# Altium PCB 400631.PcbDoc (part 8 of 8)
Units mm, origin at the board's own origin, x right, y up, seen from the top; angles counter-clockwise.
Board outline 136.53 x 63.5 mm, 4 copper layers (Top Layer, Mid-Layer 1, Mid-Layer 2, Bottom Layer), stack 1.52 mm thick; 366 components, 256 nets, 1485 pads, 1968 vias.
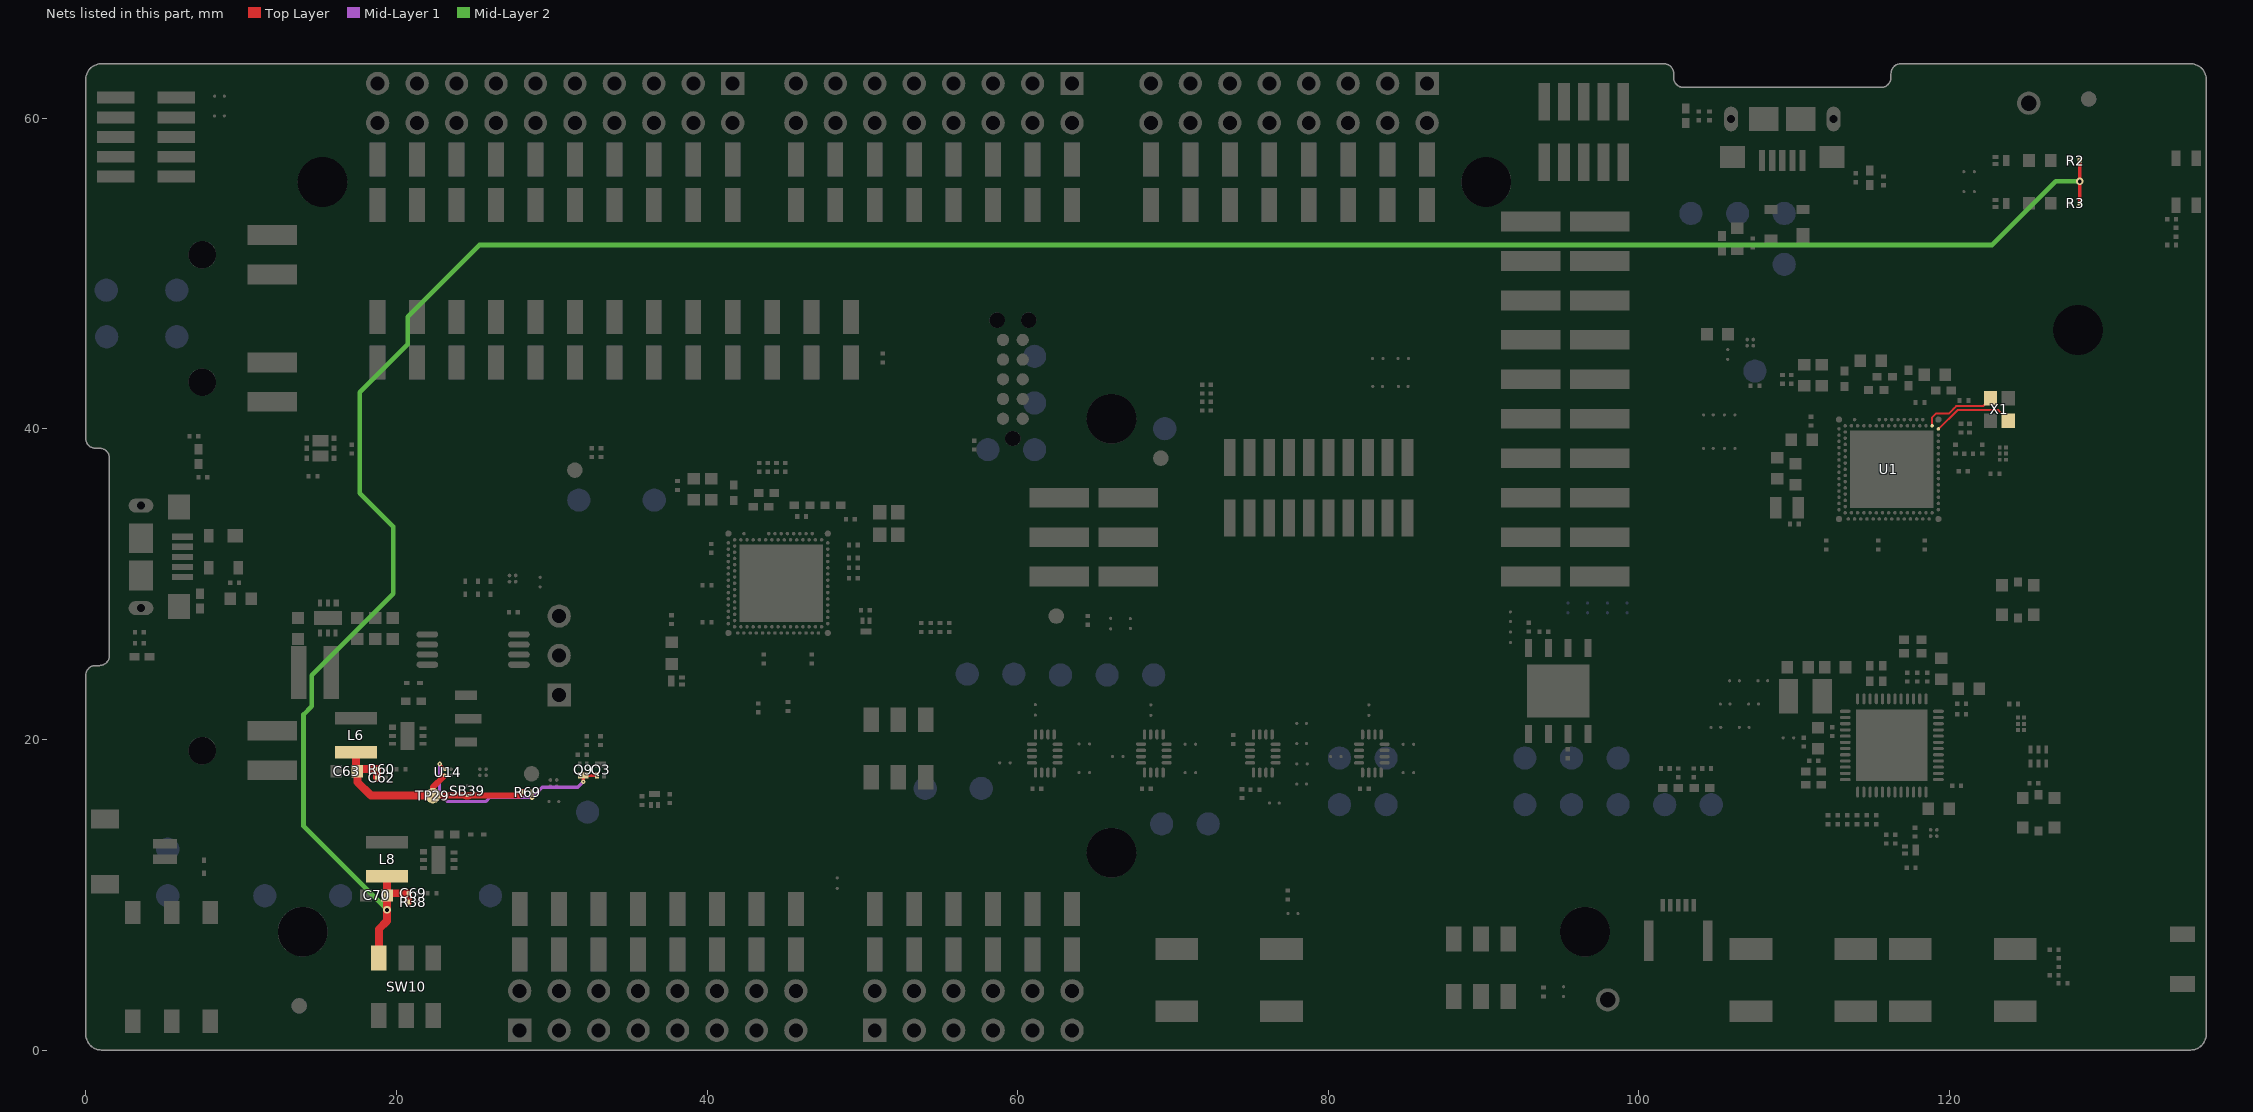
[diagram p8: the nets of this part, all layers, seen from the top]

## Via types
v1: diameter 0.5, hole 0.25, Top Layer to Bottom Layer, tented both sides, 1516 vias
v2: diameter 0.3, hole 0.1, Top Layer to Mid-Layer 1, tented top, 354 vias
v3: diameter 0.3, hole 0.1, Top Layer to Mid-Layer 1, tented both sides, 67 vias
v4: diameter 0.66, hole 0.33, Top Layer to Bottom Layer, tented both sides, 16 vias
v5: diameter 0.4, hole 0.2, Top Layer to Bottom Layer, tented both sides, 11 vias
v6: diameter 0.5, hole 0.3, Top Layer to Bottom Layer, tented both sides, 3 vias
v7: diameter 0.6, hole 0.3, Top Layer to Bottom Layer, tented both sides, 1 vias

## Nets (pads, with @x,y where several pads share a name; then routed paths per layer and width w, separated by ;. In a path a pad name is that pad's centre, name@x,y a point inside that pad or via, vN(x,y) a via of type N, cw(c..) or ccw(c..) an arc to the next point about the centre after c; other vN are vias at no path point) (continued)
VREG_1V8: C62.2 C63.2 L6.2 R60.2 R69.1 SB39.2 TP29.1 U14.A2 | length 16.4
  Top Layer w0.381: TP29.1@22.352,16.383 22.352,16.386 24.201,16.386 24.922,16.386 27.937,16.386 R69.1@28.163,16.612 ; TP29.1@22.352,16.391 22.352,16.916 U14.A2@23.038,17.602
  Top Layer w0.508: L6.2@17.399,19.093 17.399,18.049 C63.2@17.49,17.958 ; C62.2@18.765,17.551 R60.2@18.765,18.085 17.617,18.085 C63.2@17.49,17.958 ; TP29.1@22.352,16.383 18.364,16.383 17.49,17.257 C63.2@17.49,17.958
VREG_3V6: C69.2 C70.2 L8.2 R2.2 R3.2 R38.2 SW10.3 | length 166
  Top Layer w0.2: R3.2@128.378,54.516 R2.2@128.378,57.266
  Top Layer w0.508: SW10.3@18.875,5.914 18.875,7.775 19.4,8.3 C70.2@19.4,9.95 ; L8.2@19.399,11.099 19.399,10.054 C70.2@19.452,10.002 ; C70.2@19.617,10.091 20.765,10.091 R38.2@20.765,9.557
  Mid-Layer 2 w0.3: v1(19.4,9.025) 14.025,14.4 14.025,21.6 14.55,22.125 14.55,24.125 19.8,29.375 19.8,33.7 17.65,35.85 17.65,42.35 20.725,45.425 20.725,47.2 25.35,51.825 122.725,51.825 126.825,55.925 v1(128.375,55.925)
VSUPPLY_EN: Q3.1 Q9.3 R69.2 U14.B2 | length 14
  Top Layer w0.152: v2(22.784,18.415) U14.B2@23.117,18.082
  Top Layer w0.203: v2(28.733,16.262) R69.2@28.733,16.612 ; v3(32.029,17.272) Q9.3@32.029,17.684 Q3.1@32.922,17.684
  Mid-Layer 1 w0.203: v2(22.784,18.415) 22.784,16.516 23.305,15.995 25.745,15.995 26.012,16.262 v2(28.733,16.262) 29.388,16.916 31.674,16.916 v3(32.029,17.272)
XC1: U1.C31 X1.1 | length 7
  Top Layer w0.125: X1.1@123.778,40.518 123.778,40.56 123.139,41.199 120.512,41.199 120.486,41.173 ; U1.C31@119.302,39.989 120.486,41.173 ; U1.C31@119.302,39.989 U1.C31@119.278,39.989 U1.C31@119.302,39.989 ; U1.C31@119.302,39.989 120.486,41.173
XC2: U1.B30 X1.3 | length 6.4
  Top Layer w0.125: U1.B30@118.878,40.189 118.878,40.737 ; 120.252,41.292 119.936,40.976 ; X1.3@122.628,41.968 122.628,41.932 122.149,41.453 120.412,41.453 119.936,40.976 ; 118.878,40.737 119.117,40.976 ; 118.878,40.737 119.117,40.976 ; 119.117,40.976 119.936,40.976 ; 119.117,40.976 119.936,40.976
pads on no net: A1.2 Fid1.0 Fid2.0 J2.4 J2.6@3.557,28.45 J2.6@3.557,35.05 J3.4 J3.6@105.929,59.943 J3.6@112.529,59.943 J4.0 J4.6 J4.7 J4.8 J4.9 J5.0 J5.1 J5.3 J5.5 J6.0 P18.7 P18.8 P19.7 P19.8 P19.9 P21.0 P22.0 P23.0 P25.7 P25.8 P25.11 P25.13 SW6.5 SW6.6 SW8.1 SW10.4 SW10.5 SW10.6 U1. U1.A1 U1.A31 U1.AG31 U1.AL1 U1.AL31 U1.D2 U1.F2 U1.K2 U1.T2 U2. U2.A1 U2.A17 U2.A21 U2.A31 U2.AB2 U2.AD2 U2.AE1 U2.AE31 U2.AF2 U2.AG31 U2.AH2 U2.AJ1 U2.AK2 U2.AK4 U2.AK6 U2.AK8 U2.AK10 U2.AK12 U2.AK14 U2.AK16 U2.AK18 U2.AK20 U2.AL1 U2.AL31 U2.B10 U2.B14 U2.D2 U2.F2 U2.J1 U2.K2 U2.M2 U2.P2 U2.R31 U2.T2 U2.V2 U2.Y2 U3.1 U3.9 U3.13 U5.1 U5.5 U5.9 U5.13 U6.7 U6.11 U8.2 U8.3 U8.4 U8.5 U8.6 U8.21 U8.22 U8.23 U8.24 U25.1 U25.9 U25.13

## Polygon pours and split planes (outlines as drawn)
VDD on Mid-Layer 2 "Mid_Layer_2-VDD" (solid, remove dead copper, pour order 22): 0,1.016 0,24.12 cw(c0.635,24.12) 0.635,24.755 0.889,24.755 ccw(c0.889,25.39) 1.524,25.39 1.524,38.11 ccw(c0.889,38.11) 0.889,38.745 0.635,38.745 cw(c0.635,39.38) 0,39.38 0,62.484 cw(c1.016,62.484) 1.016,63.5 101.599,63.5 cw(c101.599,62.865) 102.234,62.865 102.234,62.611 ccw(c102.869,62.611) 102.869,61.976 115.589,61.976 ccw(c115.589,62.611) 116.224,62.611 116.224,62.865 cw(c116.859,62.865) 116.859,63.5 135.509,63.5 cw(c135.512,62.487) 136.525,62.49 136.525,10.16 133.985,7.62 133.985,1.016 cw(c132.969,1.016) 132.969,0 97.36,0 82.099,0 1.016,0 cw(c1.016,1.016)
VDD_IMCU on Mid-Layer 2 "Mid_Layer_2-VDD_SAM" (solid, remove dead copper, pour order 8): 33.503,36.297 33.503,21.234 53.873,21.234 53.873,36.297
GND on Bottom Layer "Bottom_Layer-GND" (solid, remove dead copper, pour order 18): 0,1.016 0,24.12 cw(c0.635,24.12) 0.635,24.755 0.889,24.755 ccw(c0.889,25.39) 1.524,25.39 1.524,38.11 ccw(c0.889,38.11) 0.889,38.745 0.635,38.745 cw(c0.635,39.38) 0,39.38 0,62.484 cw(c1.016,62.484) 1.016,63.5 101.599,63.5 cw(c101.599,62.865) 102.234,62.865 102.234,62.611 ccw(c102.869,62.611) 102.869,61.976 115.589,61.976 ccw(c115.589,62.611) 116.224,62.611 116.224,62.865 cw(c116.859,62.865) 116.859,63.5 135.509,63.5 cw(c135.504,62.479) 136.525,62.475 136.525,8.16 133.985,5.62 133.985,1.016 cw(c132.969,1.016) 132.969,0 97.36,0 82.099,0 1.016,0 cw(c1.016,1.016)
GND on Mid-Layer 1 "Mid_Layer_1-GND" (solid, remove dead copper, pour order 21): 0,1.016 0,24.12 cw(c0.635,24.12) 0.635,24.755 0.889,24.755 ccw(c0.889,25.39) 1.524,25.39 1.524,38.11 ccw(c0.889,38.11) 0.889,38.745 0.635,38.745 cw(c0.635,39.38) 0,39.38 0,62.484 cw(c1.016,62.484) 1.016,63.5 101.599,63.5 cw(c101.599,62.865) 102.234,62.865 102.234,62.611 ccw(c102.869,62.611) 102.869,61.976 115.589,61.976 ccw(c115.589,62.611) 116.224,62.611 116.224,62.865 cw(c116.859,62.865) 116.859,63.5 135.512,63.5 cw(c135.506,62.481) 136.525,62.475 136.525,10.16 133.985,7.62 133.985,1.016 cw(c132.969,1.016) 132.969,0 97.36,0 82.099,0 1.016,0 cw(c1.016,1.016)
GND on Top Layer "Top Layer-GND" (solid, remove dead copper, pour order 19): 0.007,1.005 0.007,24.109 cw(c0.642,24.109) 0.642,24.744 0.896,24.744 ccw(c0.896,25.379) 1.531,25.379 1.531,38.099 ccw(c0.896,38.099) 0.896,38.734 0.642,38.734 cw(c0.642,39.369) 0.007,39.369 0.007,62.473 cw(c1.023,62.473) 1.023,63.489 101.606,63.489 cw(c101.606,62.854) 102.241,62.854 102.241,62.6 ccw(c102.876,62.6) 102.876,61.965 115.596,61.965 ccw(c115.596,62.6) 116.231,62.6 116.231,62.854 cw(c116.866,62.854) 116.866,63.489 135.359,63.489 cw(c135.401,62.358) 136.532,62.4 136.532,3.124 133.421,0.013 cw(c133.363,0.072) 133.363,-0.011 97.367,-0.011 82.106,-0.011 1.023,-0.011 cw(c1.023,1.005)

## Keep-outs
Keep-Out Layer:
  circle w0.254: c120.987,0 r0.15
  circle w0.254: c121.937,0 r0.15
  circle w0.254: c122.887,0 r0.15
  circle w0.254: c123.837,0 r0.15
  circle w0.254: c124.787,0 r0.15
  circle w0.254: c13.167,0 r0.15
  circle w0.254: c14.117,0 r0.15
  circle w0.254: c15.067,0 r0.15
  circle w0.254: c16.017,0 r0.15
  circle w0.254: c16.967,0 r0.15
  circle w0.254: c0,21.109 r0.15
  circle w0.254: c0,20.159 r0.15
  circle w0.254: c0,19.209 r0.15
  circle w0.254: c0,18.259 r0.15
  circle w0.254: c0,17.309 r0.15
  circle w0.254: c0,51.692 r0.15
  circle w0.254: c0,50.742 r0.15
  circle w0.254: c0,49.792 r0.15
  circle w0.254: c0,48.842 r0.15
  circle w0.254: c0,47.892 r0.15
  circle w0.254: c13.167,63.5 r0.15
  circle w0.254: c14.117,63.5 r0.15
  circle w0.254: c15.067,63.5 r0.15
  circle w0.254: c16.017,63.5 r0.15
  circle w0.254: c16.967,63.5 r0.15
  circle w0.254: c120.987,63.5 r0.15
  circle w0.254: c121.937,63.5 r0.15
  circle w0.254: c122.887,63.5 r0.15
  circle w0.254: c123.837,63.5 r0.15
  circle w0.254: c124.787,63.5 r0.15
  circle w0.254: c136.525,21.109 r0.15
  circle w0.254: c136.525,20.159 r0.15
  circle w0.254: c136.525,19.209 r0.15
  circle w0.254: c136.525,18.259 r0.15
  circle w0.254: c136.525,17.309 r0.15
  circle w0.254: c136.525,47.892 r0.15
  circle w0.254: c136.525,48.842 r0.15
  circle w0.254: c136.525,49.792 r0.15
  circle w0.254: c136.525,50.742 r0.15
  circle w0.254: c136.525,51.692 r0.15
  circle w0.152: c13.97,7.62 r2.4
  circle w0.152: c66.04,12.7 r2.4
  circle w0.152: c128.27,46.355 r2.4
  circle w0.152: c15.24,55.88 r2.4
  circle w0.152: c66.04,40.64 r2.4
  circle w0.152: c96.52,7.62 r2.4
  lines w0.152: 90.89,53.591 cw(c90.17,55.88) 90.924,53.602

## Other copper
Top Layer:
  region net NetL7_2: 15.716,26.612 15.716,27.062 15.466,27.062 15.466,22.862 16.391,22.862 16.391,25.937 cw(c16.532,26.753)
  region net GND: 20.5,27.311 15.291,27.311 ccw(c15.291,27.237) 15.216,27.237 15.216,26.612 14.966,26.612 14.341,27.237 12.942,27.237 12.942,28.79 14.608,28.79 14.608,28.311 17.295,28.311 17.295,28.715 20.5,28.715
  pour cut-out: 61.011,27.584 62.001,27.584 cw(c61.94,27.523) 62.027,27.523 62.027,27.407
  region net V5V: 15.967,27.065 15.967,26.616 17.016,26.037 20.2,26.037 20.2,26.836 16.741,26.836 16.216,27.062
  pour cut-out: 116.175,24.825 118.925,24.825 118.925,27.025 116.175,27.025
  pour cut-out: 112.75,25.3 112.525,25.6 109.423,25.624 109.419,26.246 112.75,26.275
  pour cut-out: 91.812,24.75 91.887,24.675 92.862,24.675 92.862,24.975 92.687,25.15
  region net NetL5_1: 111.225,23.95 112.35,23.95 112.45,23.85 112.45,21.95 112.85,21.55 113.375,21.5 113.375,21.325 113.1,21.3 111.516,21.3 111.156,21.66 111.156,23.881
  region net VDD_BUCK: 109.131,25.2 110.075,25.2 110.25,25.025 110.25,21.6 109.95,21.3 109.206,21.3 108.956,21.55 108.956,25.025
  region net GND: 110.45,25.275 110.565,25.39 112.335,25.39 112.475,25.25 112.475,24.25 112.35,24.125 111.15,24.125 110.975,23.95 110.975,21.525 111.375,21.125 112.875,21.125 112.875,20.5 112.175,20.5 112.05,20.375 110.975,20.375 110.45,20.9
  region net VBOOST_SRC: 14.091,26.836 14.091,22.862 13.217,22.862 13.217,26.787 13.266,26.836
  pour cut-out: 15.355,22.375 15.355,26.682 14.085,26.682 14.085,22.375
  pour cut-out: 84.455,53.061 84.785,53.061 84.785,53.137 84.811,53.162
  pour cut-out: 121.945,43.129 121.945,39.395 124.46,39.395 124.46,43.129
  pour cut-out: 120.142,39.268 120.701,39.268 120.701,38.71 120.142,38.71
  pour cut-out: 98.933,12.573 99.365,12.573 99.543,12.751
  pour cut-out: 69.85,52.502 70.866,52.502 71.095,52.273
  pour cut-out: 2.567,24.813 2.565,24.816 1.626,24.816 1.626,25.019
  pour cut-out: 87.026,54.303 87.049,54.28 88.087,54.28 88.087,54.051 88.113,54.026
  pour cut-out: 11.252,43.635 9.982,43.635 9.982,42.365 11.252,42.365
  pour cut-out: 60.528,30.937 68.073,30.937 68.071,32.715 60.528,32.715
  pour cut-out: 1.371,28.204 4.424,28.204 4.418,35.281 1.372,35.281
  pour cut-out: 28.981,25.603 28.981,26.873 27.711,26.873 27.711,25.603
  pour cut-out: 22.561,4.875 22.561,6.96 19.138,6.96 19.138,4.875
Mid-Layer 1:
  pour cut-out: 113.975,22.35 113.975,22.125 113.9,22.125 113.387,22.125 cw(c113.387,22.637) 113.025,22.275 cw(c113.327,22.577) 112.9,22.577 112.9,24.921 ccw(c112.047,24.922) 112.65,25.525 ccw(c112.168,25.043) 112.167,25.725 109.558,25.725 ccw(c109.558,25.043) 109.075,25.525 ccw(c109.738,24.861) 108.8,24.861 108.8,21.72 ccw(c109.995,21.72) 109.15,20.875 ccw(c110.629,22.851) 110.175,20.425 113.975,20.425 113.975,20.15 110.64,20.15 cw(c110.409,22.586) 108.85,20.7 cw(c109.585,21.572) 108.449,21.475 108.449,24.804 cw(c109.675,24.691) 108.887,25.637 cw(c109.825,24.612) 109.887,26 112.35,26 cw(c112.295,25.203) 112.9,25.725 cw(c112.233,25.078) 113.162,25.062 113.162,22.567 ccw(c113.557,22.778) 113.427,22.35 113.825,22.35
  pour cut-out: 128.25,4.75 127.325,4.75 127.325,3.75 128.25,3.75
  pour cut-out: 92.382,25.875 91.025,25.875 91.025,27.475 92.382,27.475
  pour cut-out: 110.15,19.35 109.075,19.35 109.075,20.6 110.15,20.6
  pour cut-out: 105.025,41.871 105.025,37.871 106.934,37.871 106.934,41.871
  pour cut-out: 83.316,20.732 81.005,20.732 81.005,23.106 83.316,23.106
  pour cut-out: 79.329,17.386 79.329,19.698 81.703,19.698 81.703,17.386
  pour cut-out: 84.353,16.942 84.353,20.523 85.954,20.523 85.954,16.942
  pour cut-out: 91.592,24.666 91.592,24.105 97.765,24.105 97.765,24.689
  pour cut-out: 115.558,47.025 116.142,47.025 116.142,46.974 116.117,46.949
  pour cut-out: 69.939,16.751 69.939,20.891 72.314,20.892 72.314,16.751
  pour cut-out: 66.993,20.815 66.993,23.127 69.367,23.127 69.367,20.815
  pour cut-out: 65.266,17.386 65.266,19.698 67.64,19.698 67.64,17.386
  pour cut-out: 63.107,16.751 63.107,20.917 65.481,20.917 65.481,16.751
  pour cut-out: 58.001,17.386 58.001,19.698 60.376,19.698 60.376,17.386
  pour cut-out: 59.957,20.79 59.957,23.101 62.332,23.101 62.332,20.79
  pour cut-out: 65.303,26.695 65.303,28.245 68.021,28.245 68.021,26.695
  pour cut-out: 121.975,57.35 121.975,54.35 120.575,54.35 120.575,57.35
  pour cut-out: 47.232,9.614 47.232,11.925 49.606,11.925 49.606,9.614
  pour cut-out: 82.45,43.6 82.45,45.35 85.987,45.35 85.987,43.6
Multi-Layer:
  pour cut-out: 128.267,12.486 137.05,12.486 137.05,-2.125 128.267,-2.125
  pour cut-out: 136.175,57.9 130.175,57.9 130.175,53.9 136.175,53.9

## Silkscreen, mask and mechanical layers (free items; w line width, h text height)
Top Overlay:
  drawing of 98 lines, arcs and shapes, not listed
  text "GND" at 12.128,61.697 h1.8
  text "GND" at 89.814,61.671 h1.8
  text ".PCBNumber" at 117.019,61.468 h2
  text ".PCBRevision" at 117.084,60.165 h1.5
  text "GND" at 123.698,58.42 h1.8
  text "Debug in" at 101.219,56.032 h2 r90
  text "LED1" at 124.342,55.368 h2
  text "nRF USB" at 105.74,55.016 h2.29
  text "Debug out" at 0.406,54.127 h2
  text "P0.11" at 87.232,52.781 h1.8
  text "P0.12" at 99.8,52.781 h1.8
  text "LED2" at 124.26,52.55 h2
  text "VBAT" at 1.016,50.775 h1.4
  text "P0.13" at 87.232,50.244 h1.8
  text "P0.14" at 99.8,50.244 h1.8
  text "P1.03" at 19.304,49.384 h1.8 r90
  text "P1.02" at 21.844,49.384 h1.8 r90
  text "P0.27" at 24.384,49.384 h1.8 r90
  text "GND" at 26.924,49.386 h1.8 r90
  text "P1.15" at 29.464,49.384 h1.8 r90
  text "P1.14" at 32.004,49.384 h1.8 r90
  text "P1.13" at 34.544,49.384 h1.8 r90
  text "P1.12" at 37.084,49.384 h1.8 r90
  text "P1.11" at 39.624,49.384 h1.8 r90
  text "P1.10" at 42.164,49.384 h1.8 r90
  text "P1.09" at 46.228,49.384 h1.8 r90
  text "P1.08" at 48.768,49.384 h1.8 r90
  text "P1.07" at 51.308,49.384 h1.8 r90
  text "P1.06" at 53.848,49.384 h1.8 r90
  text "P1.05" at 56.388,49.384 h1.8 r90
  text "P1.04" at 58.928,49.384 h1.8 r90
  text "P1.01" at 61.468,49.384 h1.8 r90
  text "P0.10" at 69.088,49.384 h1.8 r90
  text "P0.09" at 71.628,49.384 h1.8 r90
  text "P0.08" at 74.168,49.384 h1.8 r90
  text "P0.07" at 76.708,49.384 h1.8 r90
  text "P0.03" at 79.248,49.384 h1.8 r90
  text "P0.02" at 81.788,49.384 h1.8 r90
  text "P0.01" at 84.328,49.384 h1.8 r90
  text "P0.00" at 86.868,49.384 h1.8 r90
  text "For evaluation only; / not FCC approved for resale." at 118.975,49.1 h1.5
  text "P0.15" at 87.232,47.706 h1.8
  text "P0.16" at 99.8,47.706 h1.8
  text "nRF current" at 0.965,47.193 h2
  text "measurement" at 0.483,45.898 h2
  text "P0.18" at 99.8,45.269 h1.8
  text "P0.17" at 87.232,45.169 h1.8
  text "VDD" at 79.214,44.144 h0.76
  text "P0.20" at 99.8,42.681 h1.8
  text "P0.19" at 87.232,42.631 h1.8
  text "VDD" at 1.016,42.57 h1.4
  text "VDD_MEAS" at 75.405,42.408 h0.76
  text "ID" at 49.696,41.814 h1.4 r90
  text "VIO / REF" at 47.678,40.824 h1.4 r90
  text "VTG" at 24.296,40.522 h1.4 r90
  text "VDD" at 21.756,40.446 h1.4 r90
  text "VIN / 3-5V" at 40.05,40.368 h1.4 r90
  text "SWD / IO" at 27.376,40.206 h1.4 r90
  text "SWD / CLK" at 30.043,40.206 h1.4 r90
  text "TRACE" at 76.505,40.183 h1.8
  text "P0.21" at 87.232,40.094 h1.8
  text "SWO" at 31.934,40.076 h1.4 r90
  text "VBAT" at 44.616,39.847 h1.4 r90
  text "VDD / MEAS" at 19.765,39.73 h1.4 r90
  text "VBAT / MEAS" at 42.694,39.73 h1.4 r90
  text "P0.22" at 99.8,39.7 h1.8
  text "RESET" at 34.474,39.684 h1.4 r90
  text "GND / DETECT" at 37.536,38.765 h1.4 r90
  text "(ARDUINO D0) P1.00" at 64.059,38.6 h1.8 r90
  text "P0.23" at 87.232,37.556 h1.8
  text "P0.24" at 99.8,36.65 h1.8
  text "P1.14" at 57.767,35.082 h1.5
  text "5V" at 69.248,35.031 h1.5
  text "P0.28" at 87.232,35.019 h1.8
  text "P0.29" at 99.8,35.019 h1.8
  text "GPIO" at 104.953,34.877 h1.5 r90
  text "XTAL" at 106.35,34.877 h1.5 r90
  text "P1.13" at 69.248,32.567 h1.5
  text "P1.15" at 57.717,32.542 h1.5
  text "P0.30" at 87.232,32.482 h1.8
  text "P0.31" at 99.8,32.482 h1.8
  text "DETECT" at 69.16,30.074 h1.5
  text "RESET" at 56.955,30.002 h1.5
  text "GND" at 87.232,29.944 h1.8
  text "GND" at 99.8,29.925 h1.8
  text "FLOW / CONTROL" at 48.641,22.327 h1.8
  text "Li-Po" at 5.776,22.179 h2
  text "-" at 13.741,19.939 h1.52
  text "VCOM0" at 43.657,19.71 h1.8
  text "VCOM1" at 43.657,18.059 h1.8
  text "+" at 13.741,17.399 h1.52
  text "OFF" at 48.93,15.164 h1.8
  text "ON" at 52.888,15.164 h1.8
  text "Li-Po" at 2.5,15.1 h2
  text "-" at 5.715,13.513 h1.02
  text "nRF7002-DK" at 81.05,12.225 h5.5
  text "+" at 5.715,10.973 h1.02
  text "N.C." at 46.253,10.465 h1.8 r90
  text "VDD" at 28.49,10.462 h1.8 r90
  text "VDD" at 31.03,10.462 h1.8 r90
  text "RESET" at 33.57,10.462 h1.8 r90
  text "VDD" at 36.11,10.462 h1.8 r90
  text "5V" at 38.65,10.462 h1.8 r90
  text "GND" at 41.19,10.462 h1.8 r90
  text "GND" at 43.73,10.462 h1.8 r90
  text "P0.04 / (A0)" at 52.296,10.462 h1.8 r90
  text "P0.05" at 53.865,10.462 h1.8 r90
  text "P0.06" at 56.405,10.462 h1.8 r90
  text "P0.07" at 58.945,10.462 h1.8 r90
  text "P0.25" at 61.485,10.462 h1.8 r90
  text "P0.26" at 64.025,10.462 h1.8 r90
  text "NFC" at 101.244,10.135 h2.29
  text "RESET" at 71.374,8.204 h2
  text "Button 1" at 107.547,7.92 h2
  text "Button 2" at 117.771,7.92 h2
  text "VBAT" at 18.9,7.15 h2
  text "POWER" at 11.506,2.667 h2 r90
  text "GND" at 65.71,1.956 h1.8
  text "ON" at 0.536,0.979 h1.8
  text "OFF" at 8.905,0.979 h1.8
  text "IMCU DISABLE" at 78.825,0.876 h1.8
  text "DEFAULT" at 89.625,0.886 h1.8
  text "REG" at 15.246,0.8 h1.8
  text "Li-Po" at 23.175,0.8 h1.8
  text "GND" at 96.545,0.686 h1.8
Bottom Overlay:
  drawing of 1248 lines, arcs and shapes, not listed
  text "J-Link" at 9.782,62.681 h1.45 r90
  text "www.segger.com" at 10.932,62.6 h1.68 r90
  text "TM" at 9.36,59.211 h0.94 r90
  text "S" at 7.922,58.998 h1.35 r90
  text "E" at 7.922,58.108 h1.35 r90
  text "Technology" at 9.782,57.929 h1.45 r90
  text "G" at 7.922,57.324 h1.35 r90
  text "G" at 7.922,56.334 h1.35 r90
  text "E" at 7.922,55.31 h1.35 r90
  text "R" at 7.922,54.474 h1.35 r90
  text "P1.03" at 19.303,53.111 h1.65 r90
  text "P1.02" at 21.843,53.111 h1.65 r90
  text "P0.27" at 24.383,53.111 h1.65 r90
  text "GND" at 26.924,53.111 h1.65 r90
  text "P1.15" at 29.463,53.111 h1.65 r90
  text "P1.14" at 32.003,53.111 h1.65 r90
  text "P1.13" at 34.543,53.111 h1.65 r90
  text "P1.12" at 37.083,53.111 h1.65 r90
  text "P1.11" at 39.623,53.111 h1.65 r90
  text "P1.10" at 42.163,53.111 h1.65 r90
  text "P1.09" at 46.227,53.111 h1.65 r90
  text "P1.08" at 48.59,53.111 h1.65 r90
  text "P1.07 (D5)" at 51.308,53.111 h1.65 r90
  text "P1.06 (D4)" at 53.848,53.111 h1.65 r90
  text "P1.05 (D3)" at 56.388,53.111 h1.65 r90
  text "P1.04 (D2)" at 58.928,53.111 h1.65 r90
  text "P1.01 (D1)" at 61.468,53.111 h1.65 r90
  text "P1.00 (ARDUINO D0)" at 64.008,53.111 h1.65 r90
  text "P0.10" at 69.088,53.111 h1.78 r90
  text "P0.09" at 71.628,53.111 h1.78 r90
  text "P0.08" at 74.168,53.111 h1.78 r90
  text "P0.07" at 76.708,53.111 h1.78 r90
  text "P0.03" at 79.248,53.111 h1.78 r90
  text "P0.02" at 81.788,53.111 h1.78 r90
  text "P0.01" at 84.328,53.111 h1.78 r90
  text "P0.00" at 86.843,53.111 h1.78 r90
  text "(SCL)" at 20.421,52.125 h1.65 r90
  text "(SDA)" at 22.961,52.125 h1.65 r90
  text "(AREF)" at 25.501,52.125 h1.65 r90
  text "(D13)" at 30.581,52.125 h1.65 r90
  text "(D12)" at 33.121,52.125 h1.65 r90
  text "(D11)" at 35.661,52.125 h1.65 r90
  text "(D10)" at 38.201,52.125 h1.65 r90
  text "(D9)" at 40.741,52.125 h1.65 r90
  text "(D8)" at 43.281,52.125 h1.65 r90
  text "(D7)" at 47.345,52.125 h1.65 r90
  text "(D6)" at 49.72,52.125 h1.65 r90
  text "GPIO" at 72.875,48.045 h2 r90
  text "P0.00" at 76.71,47.995 h2 r90
  text "P0.01" at 82.095,47.995 h2 r90
  text "P1.08" at 86.134,47.995 h2 r90
  text "P1.09" at 88.826,47.995 h2 r90
  text "P0.08" at 91.222,47.995 h2 r90
  text "P0.09" at 93.914,47.995 h2 r90
  text "P0.10" at 96.607,47.995 h2 r90
  text "P0.11" at 99.299,47.995 h2 r90
  text "P1.06" at 104.697,47.995 h2 r90
  text "P1.07" at 107.39,47.995 h2 r90
  text "P0.18" at 110.082,47.995 h2 r90
  text "P0.17" at 112.774,47.995 h2 r90
  text "P0.13" at 115.467,47.995 h2 r90
  text "P0.14" at 118.159,47.995 h2 r90
  text "P0.15" at 120.852,47.995 h2 r90
  text "P0.16" at 123.544,47.995 h2 r90
  text "Function" at 73.352,42.973 h2 r90
  text "Button 2" at 88.826,42.301 h2 r90
  text "TRACE0" at 91.222,42.242 h2 r90
  text "TRACE4" at 99.299,42.224 h2 r90
  text "TRACE2" at 96.607,42.178 h2 r90
  text "Button 1" at 86.134,42.084 h2 r90
  text "TRACE1" at 93.914,41.96 h2 r90
  text "GPIO" at 10.739,41.853 h2 r90
  text "P0.19" at 13.228,41.831 h1.91 r90
  text "P0.20" at 15.911,41.831 h1.91 r90
  text "P0.21" at 18.594,41.831 h1.91 r90
  text "P0.22" at 21.277,41.831 h1.91 r90
  text "P1.05" at 23.959,41.831 h1.91 r90
  text "P1.01" at 26.642,41.831 h1.91 r90
  text "P1.04" at 29.325,41.831 h1.91 r90
  text "P1.00" at 32.008,41.831 h1.91 r90
  text "P0.11" at 34.691,41.831 h1.91 r90
  text "RESET" at 37.464,41.831 h1.91 r90
  text "SWDIO" at 40.154,41.831 h1.91 r90
  text "SWDCLK" at 42.844,41.831 h1.91 r90
  text "P0.02" at 46.4,41.831 h1.91 r90
  text "P0.03" at 50.972,41.831 h1.91 r90
  text "LED 2" at 107.401,41.225 h2 r90
  text "DIO0" at 115.467,41.084 h2 r90
  text "DIO3" at 123.544,41.037 h2 r90
  text "LED 1" at 104.708,41.008 h2 r90
  text "DIO2" at 120.852,41.02 h2 r90
  text "DIO1" at 118.159,40.802 h2 r90
  text "CLK" at 112.774,40.735 h2 r90
  text "XL2" at 82.095,40.573 h2 r90
  text "XL1" at 76.71,40.356 h2 r90
  text "CS" at 110.082,40.149 h2 r90
  text "Function" at 11.19,36.75 h2 r90
  text "NFC2" at 50.998,34.864 h1.91 r90
  text "NFC1" at 46.426,34.768 h1.91 r90
  text "R30/SB20" at 123.544,34.558 h1.7 r90
  text "R26/SB23" at 110.082,34.474 h1.7 r90
  text "R29/SB24" at 118.159,34.488 h1.7 r90
  text "R28/SB22" at 115.467,34.467 h1.7 r90
  text "RTS" at 13.228,34.438 h1.91 r90
  text "TXD" at 15.933,34.438 h1.91 r90
  text "CTS" at 18.594,34.436 h1.91 r90
  text "RXD" at 21.299,34.438 h1.91 r90
  text "RTS" at 23.959,34.438 h1.91 r90
  text "TXD" at 26.665,34.438 h1.91 r90
  text "CTS" at 29.325,34.436 h1.91 r90
  text "SWO" at 34.691,34.438 h1.91 r90
  text "R31/SB25" at 120.852,34.332 h1.7 r90
  text "SB14" at 99.209,34.3 h2 r90
  text "Short" at 73.372,34.277 h2 r90
  text "SB13" at 96.484,34.27 h2 r90
  text "SB12" at 93.909,34.253 h2 r90
  text "R27/SB21" at 112.774,34.219 h1.7 r90
  text "SB11" at 91.279,34.036 h2 r90
  text "SB4" at 83.441,34.018 h2 r90
  text "SB6" at 107.398,34.015 h2 r90
  text "SB3" at 78.057,33.989 h2 r90
  text "SB5" at 104.705,34 h2 r90
  text "SB2" at 80.749,33.972 h2 r90
  text "RXD" at 32.03,33.938 h1.91 r90
  text "SB1" at 75.364,33.698 h1.91 r90
  text "HW" at 11.139,28.496 h2 r90
  text "IF / MCU" at 27.833,28.115 h1.78 r90
  text "GPIO" at 18.447,27.861 h1.78 r90
  text "GPIO" at 52.108,27.317 h1.78 r90
  text "GPIO" at 81.047,27.271 h1.6 r90
  text "GPIO" at 93.914,27.268 h1.6 r90
  text "GPIO" at 118.388,27.255 h1.6 r90
  text "N.C" at 49.042,26.46 h1.27 r90
  text "PIN" at 45.061,25.107 h1.78 r90
  text "HW" at 72.875,24.863 h2 r90
  text "SB1x" at 91.556,24.398 h1.4 r90
  text "SB2x" at 113.816,24.385 h1.4 r90
  text "Rxx" at 116.102,24.385 h1.6 r90
  text "0R" at 51.836,23.162 h1.27 r90
  text "VDD" at 101.426,22.454 h1.6 r90
  text "WIFI" at 118.388,22.364 h1.6 r90
  text "NFC" at 48.135,22.161 h1.78 r90
  text "PIN" at 76.538,21.709 h1.6 r90
  text "PIN" at 93.933,21.705 h1.6 r90
  text "PIN" at 113.943,21.692 h1.6 r90
  text "IF OFF" at 23.159,21.257 h1.78 r90
  text "P0.04 (A0)" at 51.181,16.319 h1.5 r90
  text "P0.05 (A1)" at 53.259,16.319 h1.5 r90
  text "P0.06 (A2)" at 56.261,16.319 h1.5 r90
  text "P0.07 (A3)" at 59.376,16.319 h1.5 r90
  text "P0.25 (A4)" at 61.335,16.319 h1.5 r90
  text "P0.26 (A5)" at 63.881,16.319 h1.5 r90
  text "RESET" at 33.472,13.85 h1.5 r90
  text "GND" at 41.092,13.192 h1.5 r90
  text "GND" at 43.555,13.192 h1.5 r90
  text "VDD" at 28.398,13.03 h1.5 r90
  text "VDD" at 30.938,13.03 h1.5 r90
  text "VDD" at 36.018,13.03 h1.5 r90
  text "N.C." at 46.222,12.725 h1.5 r90
  text "5V" at 38.583,11.963 h1.5 r90
Board Outline:
  lines w0.254: 82.093,0 97.36,0 135.509,0 ccw(c135.509,1.016) 136.525,1.016 136.525,62.484 ccw(c135.509,62.484) 135.509,63.5 ; 82.099,0 1.016,0 cw(c1.016,1.016) 0,1.016 0,24.12 cw(c0.635,24.12) 0.635,24.755 0.889,24.755 ccw(c0.889,25.39) 1.524,25.39 1.524,38.11 ccw(c0.889,38.11) 0.889,38.745 0.635,38.745 cw(c0.635,39.38) 0,39.38 0,62.484 cw(c1.016,62.484) 1.016,63.5 101.599,63.5 cw(c101.599,62.865) 102.234,62.865 102.234,62.611 ccw(c102.869,62.611) 102.869,61.976 115.589,61.976 ccw(c115.589,62.611) 116.224,62.611 116.224,62.865 cw(c116.859,62.865) 116.859,63.5 135.5,63.5
Top Assembly:
  circle w0.1: c128.27,46.355 r1.6
  circle w0.1: c96.52,7.62 r1.6
  circle w0.1: c66.04,12.7 r1.6
  circle w0.1: c13.97,7.62 r1.6
  circle w0.1: c15.24,55.88 r1.6
  circle w0.1: c66.04,40.64 r1.6
  circle w0.1: c90.17,55.88 r1.6
  lines w0.254: 78.7,3.225 78.7,11.225 86.7,11.225 86.7,3.225 78.7,3.225 ; 111.675,46.15 119.675,46.15 119.675,54.15 111.675,54.15 111.675,46.15
Bottom Assembly:
  drawing of 51 lines, arcs and shapes, not listed
Top Impedance Info:
  lines w0.107: 119.278,19.809 119.548,19.809 119.631,19.725 123.467,19.725 cw(c123.467,19.042) 123.95,19.525 ccw(c124.379,19.954) 124.379,19.347 125.218,19.347 ; 119.287,20.6 124.4,20.6 ; 120.363,38.389 119.278,38.389 120.933,38.389 120.949,38.405 ; 121.511,38.397 121.514,38.4 123.225,38.4 123.221,38.396 122.098,38.396 ; 123.625,38 123.905,37.72 cw(c122.71,36.525) 124.344,36.956 cw(c122.71,36.525) 124.4,36.525 124.4,30.135 ; 123.625,38.8 132.045,38.8 ccw(c132.045,41.34) 134.585,41.34 134.585,51.775 ; 124.4,27.815 124.4,21.4 ; 124.8,21 125.775,21 cw(c125.775,20.55) 126.225,20.55 126.225,19.347 126.218,19.347 ; 125.718,16.435 125.718,18.447 ; 125.74,14.1 125.74,12.993 ccw(c127.993,12.993) 126.4,11.4 cw(c124.891,9.891) 127.025,9.891 127.025,7.672 127.025,5.91 ; 127.025,4.34 127.025,4.825 127.025,5.34 ; 134.575,51.825 134.575,52.365 ; 134.575,52.935 134.575,53.475 134.575,54.4 ; 124.4,21.4 124.4,21.4 ; 126.218,19.347 126.218,19.347 ; 134.575,52.365 134.575,52.365 ; 134.585,51.775 134.585,51.775 ; 134.575,40.175 134.575,40.175
  lines w0.129: 6.232,31.75 7.11,31.75 cw(c7.11,31.055) 7.805,31.055 ; 7.805,33.105 cw(c7.1,33.105) 7.1,32.4 6.232,32.4 ; 8.08,31.055 cw(c8.885,31.055) 8.88,31.86 cw(c8.885,31.055) 8.885,31.86 12.312,31.86 ccw(c12.312,34.829) 14.412,32.73 14.738,33.056 cw(c16.534,31.26) 16.534,33.8 36.601,33.8 ; 8.08,33.105 ccw(c8.896,33.105) 8.896,32.289 12.312,32.289 ccw(c12.312,34.829) 14.108,33.033 14.434,33.359 cw(c16.534,31.26) 14.436,33.361 cw(c16.534,31.26) 14.603,33.516 cw(c16.534,31.26) 16.303,34.22 cw(c16.534,31.26) 16.534,34.229 39.6,34.229 cw(c39.6,34.118) 39.679,34.196 ccw(c39.791,34.309) 39.791,34.15 41.271,34.15 cw(c41.271,33.496) 41.734,33.958 41.845,33.847 cw(c41.349,33.35) 42.051,33.35 42.051,33.023 42.176,32.898 42.176,32.848 ; 36.601,33.68 36.601,33.8 ; 41.776,32.848 41.776,33.25 ccw(c41.175,33.25) 41.715,33.514 41.646,33.583 ccw(c41.121,33.058) 41.121,33.8 36.601,33.8 ; 109.169,43.389 ccw(c109.169,43.536) 109.316,43.536 109.316,53.474 108.916,53.875 108.741,53.875 108.506,54.11 ccw(c108.506,54.412) 108.719,54.199 108.838,54.317 ccw(c108.768,54.386) 108.866,54.386 cw(c108.964,54.386) 108.895,54.456 ; 109.229,57.268 cw(c109.229,57.158) 109.339,57.158 109.339,55.239 cw(c108.521,55.239) 109.1,54.66 108.895,54.456 ; 109.809,50.514 109.809,50.407 109.745,50.343 ; 109.812,43.473 cw(c109.812,43.54) 109.745,43.54 109.745,50.343 ; 109.879,57.268 ccw(c109.879,57.158) 109.768,57.158 109.768,55.219 ccw(c110.544,55.219) 109.995,54.671 ccw(c110.544,55.219) 109.996,54.671 110.151,54.515 cw(c110.045,54.408) 110.195,54.408 ccw(c110.346,54.408) 110.239,54.302 ; 6.232,32.4 6.232,32.4 ; 108.895,54.456 ccw(c108.964,54.386) 108.895,54.456 ; 108.895,54.456 108.895,54.456 ; 109.745,50.343 109.745,53.427 cw(c110.193,53.427) 110.193,53.875 110.32,53.875 110.556,54.11 cw(c110.556,54.412) 110.342,54.199 110.24,54.301 ; 110.239,54.302 ccw(c110.346,54.408) 110.24,54.301 ; 110.239,54.302 110.24,54.301
  lines w0.165: 109.245,42.895 cw(c109,42.65) 109.347,42.65 109.347,42.443 ccw(c110.254,42.443) 109.613,41.802 ccw(c111.13,43.319) 111.13,41.173 112.421,41.173 cw(c112.421,40.133) 113.157,40.869 cw(c112.866,40.577) 113.278,40.577 113.278,40.189 113.284,40.195 ; 109.804,42.895 ccw(c110.05,42.65) 109.703,42.65 109.703,42.443 ccw(c110.254,42.443) 109.864,42.053 ccw(c111.13,43.32) 111.13,41.529 112.421,41.529 cw(c112.421,40.133) 113.408,41.12 cw(c113.034,40.746) 113.563,40.746 113.563,40.465 ccw(c113.953,40.465) 113.678,40.189 ; 109.804,43.465 109.812,43.473
  text "90ohm differensial impedance" at 97.307,57.785 h1.02
  text "50ohm impedance" at 118.95,40.3 h1.02
  text "90ohm differensial impedance" at 16.053,32.004 h1.02
Route Tool Path:
  lines w2: -1,1.016 ccw(c1.016,1.016) 1.016,-1 12.817,-1 ; -1,1.216 -1,16.959 ; -1,21.459 -1,24.1 ; -1,47.541 -1,39.38 ; -1,52.042 -1,62.484 cw(c1.016,62.484) 1.016,64.5 12.817,64.5 ; 17.317,-1 120.637,-1 ; 17.317,64.5 101.599,64.5 ; 120.637,64.5 116.859,64.5 ; 125.137,-1 135.509,-1 ; 125.137,64.5 135.509,64.5 cw(c135.509,62.484) 137.525,62.484 137.525,52.042 ; 137.525,16.959 137.525,1.016 ; 137.525,21.459 137.525,47.5 ; -1,24.12 cw(c0.635,24.12) 0.524,25.751 0.524,37.749 cw(c0.635,39.38) -1,39.377 ; -1,24.12 -1,24.12 ; -1,24.12 -1,39.377 ; -1,39.377 cw(c0.635,39.38) -1,39.38 ; -1,39.377 cw(c0,39.38) -1,39.38 ; 101.599,64.5 cw(c101.599,62.865) 103.23,62.976 115.228,62.976 cw(c116.859,62.865) 116.856,64.5 ; 101.599,64.5 116.856,64.5 ; 101.599,64.5 101.599,64.5 ; 116.856,64.5 cw(c116.859,62.865) 116.859,64.5 ; 116.856,64.5 cw(c116.859,63.5) 116.859,64.5 ; 135.509,-1 ccw(c135.509,1.016) 137.525,1.016 ; 135.509,-1 135.509,-1 ; 137.525,1.016 137.525,1.016

## Dimensions
135.509,62.484 to 136.175,65.69 on Dimensions
0,1.016 to 90.17,55.88 on Dimensions
0,1.016 to 136.525,62.484 on Dimensions
0,1.016 to 136.525,1.016 on Dimensions
0,1.016 to 13.97,7.62 on Dimensions
0,1.016 to 15.24,55.88 on Dimensions
0,1.016 to 66.04,12.7 on Dimensions
0,1.016 to 96.52,7.62 on Dimensions
135.509,0 to 101.599,63.5 on Dimensions
135.509,0 to 96.52,7.62 on Dimensions
135.509,0 to 66.04,12.7 on Dimensions
135.509,0 to 66.04,40.64 on Dimensions
135.509,0 to 15.24,55.88 on Dimensions
135.509,0 to 128.27,46.355 on Dimensions
0,1.016 to 128.27,46.355 on Dimensions

## Text inside footprints (layer, text, board x,y; h text height)
P18: Top Overlay "1" at 93.744,54.656 h1.02
P19: Top Overlay "1" at 7.569,55.728 h1.02
P25: Top Overlay "1" at 84.887,39.599 h1.02
U1: Top Component Info "AG1" at 112.537,35.149 h0.08; Top Component Info "AJ1" at 112.537,34.749 h0.08; Top Component Info "AH2" at 112.87,34.949 h0.08; Top Component Info "AK4" at 113.569,34.349 h0.08; Top Component Info "AL5" at 113.763,33.949 h0.08; Top Component Info "AK2" at 113.169,34.375 h0.08; Top Component Info "AL3" at 113.363,33.949 h0.08; Top Component Info "V2" at 112.95,36.949 h0.08; Top Component Info "Y2" at 112.95,36.549 h0.08; Top Component Info "AA1" at 112.543,36.349 h0.08; Top Component Info "W1" at 112.609,36.749 h0.08; Top Component Info "AD2" at 112.87,35.749 h0.08; Top Component Info "AC1" at 112.537,35.949 h0.08; Top Component Info "AE1" at 112.556,35.549 h0.08; Top Component Info "AB2" at 112.87,36.149 h0.08; Top Component Info "H2" at 112.95,38.949 h0.08; Top Component Info "J1" at 112.609,38.749 h0.08; Top Component Info "G1" at 112.609,39.149 h0.08; Top Component Info "M2" at 112.95,38.149 h0.08; Top Component Info "L1" at 112.589,38.349 h0.08; Top Component Info "P2" at 112.95,37.749 h0.08; Top Component Info "R1" at 112.622,37.549 h0.08; Top Component Info "N1" at 112.628,37.949 h0.08; Top Component Info "K2" at 112.95,38.549 h0.08; Top Component Info "D2" at 112.95,39.749 h0.08; Top Component Info "E1" at 112.628,39.549 h0.08; Top Component Info "C1" at 112.609,39.949 h0.08; Top Component Info "B4" at 113.609,40.35 h0.08; Top Component Info "A5" at 113.805,40.749 h0.08; Top Component Info "B2" at 113.224,40.336 h0.08; Top Component Info "AK14" at 115.54,34.349 h0.08; Top Component Info "AL13" at 115.333,33.949 h0.08; Top Component Info "AK10" at 114.74,34.349 h0.08; Top Component Info "AL11" at 114.933,33.949 h0.08; Top Component Info "AK12" at 115.14,34.349 h0.08; Top Component Info "AK8" at 114.369,34.35 h0.08; Top Component Info "AL7" at 114.163,33.949 h0.08; Top Component Info "AL9" at 114.533,33.949 h0.08; Top Component Info "AL15" at 115.733,33.949 h0.08; Top Component Info "B14" at 115.579,40.35 h0.08; Top Component Info "A13" at 115.376,40.749 h0.08; Top Component Info "B10" at 114.779,40.35 h0.08; Top Component Info "B12" at 115.179,40.35 h0.08; Top Component Info "B8" at 114.409,40.35 h0.08; Top Component Info "A15" at 115.776,40.749 h0.08; Top Component Info "AK24" at 117.54,34.349 h0.08; Top Component Info "AL23" at 117.333,33.949 h0.08; Top Component Info "AL25" at 117.733,33.949 h0.08; Top Component Info "AK20" at 116.74,34.349 h0.08; Top Component Info "AL21" at 116.933,33.949 h0.08; Top Component Info "AK18" at 116.34,34.35 h0.08; Top Component Info "AL17" at 116.133,33.949 h0.08; Top Component Info "AL19" at 116.533,33.949 h0.08; Top Component Info "AK22" at 117.14,34.349 h0.08; Top Component Info "B24" at 117.579,40.35 h0.08; Top Component Info "A23" at 117.376,40.749 h0.08; Top Component Info "A25" at 117.776,40.749 h0.08; Top Component Info "B20" at 116.779,40.35 h0.08; Top Component Info "A21" at 116.976,40.749 h0.08; Top Component Info "B18" at 116.379,40.35 h0.08; Top Component Info "A17" at 116.176,40.749 h0.08; Top Component Info "A19" at 116.576,40.749 h0.08; Top Component Info "B22" at 117.179,40.35 h0.08; Top Component Info "AL29" at 118.533,33.949 h0.08; Top Component Info "AL27" at 118.133,33.949 h0.08; Top Component Info "AK28" at 118.34,34.35 h0.08; Top Component Info "AG31" at 119.4,35.149 h0.08; Top Component Info "AJ31" at 119.4,34.749 h0.08; Top Component Info "AK30" at 118.74,34.349 h0.08; Top Component Info "U31" at 119.4,37.149 h0.08; Top Component Info "AA31" at 119.4,36.349 h0.08; Top Component Info "W31" at 119.4,36.749 h0.08; Top Component Info "AC31" at 119.4,35.949 h0.08; Top Component Info "AE31" at 119.4,35.549 h0.08; Top Component Info "J31" at 119.4,38.749 h0.08; Top Component Info "G31" at 119.4,39.149 h0.08; Top Component Info "L31" at 119.4,38.349 h0.08; Top Component Info "R31" at 119.4,37.549 h0.08; Top Component Info "N31" at 119.4,37.949 h0.08; Top Component Info "E31" at 119.4,39.549 h0.08; Top Component Info "C31" at 119.4,39.949 h0.08; Top Component Info "B30" at 118.779,40.35 h0.08; Top Component Info "A27" at 118.176,40.749 h0.08; Top Component Info "B28" at 118.379,40.35 h0.08; Top Component Info "AF2" at 112.87,35.349 h0.08; Top Component Info "F2" at 112.95,39.349 h0.08; Top Component Info "T2" at 112.95,37.349 h0.08; Top Component Info "AK6" at 113.969,34.35 h0.08; Top Component Info "B6" at 114.009,40.35 h0.08; Top Component Info "AK26" at 117.94,34.35 h0.08; Top Component Info "AK16" at 115.94,34.35 h0.08; Top Component Info "B26" at 117.979,40.35 h0.08; Top Component Info "B16" at 115.979,40.35 h0.08
U2: Top Component Info "B16" at 44.478,33.009 h0.08; Top Component Info "B26" at 46.478,33.009 h0.08; Top Component Info "AK16" at 44.438,27.009 h0.08; Top Component Info "AK26" at 46.438,27.009 h0.08; Top Component Info "B6" at 42.507,33.009 h0.08; Top Component Info "AK6" at 42.468,27.009 h0.08; Top Component Info "T2" at 41.448,30.008 h0.08; Top Component Info "F2" at 41.448,32.008 h0.08; Top Component Info "AF2" at 41.368,28.008 h0.08; Top Component Info "B28" at 46.878,33.009 h0.08; Top Component Info "A27" at 46.674,33.409 h0.08; Top Component Info "B30" at 47.278,33.009 h0.08; Top Component Info "C31" at 47.898,32.608 h0.08; Top Component Info "E31" at 47.898,32.208 h0.08; Top Component Info "N31" at 47.898,30.608 h0.08; Top Component Info "R31" at 47.898,30.208 h0.08; Top Component Info "L31" at 47.898,31.008 h0.08; Top Component Info "G31" at 47.898,31.808 h0.08; Top Component Info "J31" at 47.898,31.408 h0.08; Top Component Info "AE31" at 47.898,28.208 h0.08; Top Component Info "AC31" at 47.898,28.608 h0.08; Top Component Info "W31" at 47.898,29.408 h0.08; Top Component Info "AA31" at 47.898,29.008 h0.08; Top Component Info "U31" at 47.898,29.808 h0.08; Top Component Info "AK30" at 47.238,27.009 h0.08; Top Component Info "AJ31" at 47.898,27.408 h0.08; Top Component Info "AG31" at 47.898,27.808 h0.08; Top Component Info "AK28" at 46.838,27.009 h0.08; Top Component Info "AL27" at 46.632,26.609 h0.08; Top Component Info "AL29" at 47.032,26.609 h0.08; Top Component Info "B22" at 45.678,33.009 h0.08; Top Component Info "A19" at 45.074,33.409 h0.08; Top Component Info "A17" at 44.674,33.409 h0.08; Top Component Info "B18" at 44.878,33.009 h0.08; Top Component Info "A21" at 45.474,33.408 h0.08; Top Component Info "B20" at 45.278,33.009 h0.08; Top Component Info "A25" at 46.274,33.409 h0.08; Top Component Info "A23" at 45.874,33.408 h0.08; Top Component Info "B24" at 46.078,33.009 h0.08; Top Component Info "AK22" at 45.638,27.009 h0.08; Top Component Info "AL19" at 45.032,26.609 h0.08; Top Component Info "AL17" at 44.632,26.609 h0.08; Top Component Info "AK18" at 44.838,27.009 h0.08; Top Component Info "AL21" at 45.432,26.609 h0.08; Top Component Info "AK20" at 45.238,27.008 h0.08; Top Component Info "AL25" at 46.232,26.609 h0.08; Top Component Info "AL23" at 45.832,26.609 h0.08; Top Component Info "AK24" at 46.038,27.009 h0.08; Top Component Info "A15" at 44.274,33.409 h0.08; Top Component Info "B8" at 42.907,33.009 h0.08; Top Component Info "B12" at 43.678,33.009 h0.08; Top Component Info "B10" at 43.278,33.009 h0.08; Top Component Info "A13" at 43.874,33.408 h0.08; Top Component Info "B14" at 44.078,33.009 h0.08; Top Component Info "AL15" at 44.232,26.609 h0.08; Top Component Info "AL9" at 43.032,26.609 h0.08; Top Component Info "AL7" at 42.661,26.609 h0.08; Top Component Info "AK8" at 42.868,27.009 h0.08; Top Component Info "AK12" at 43.638,27.009 h0.08; Top Component Info "AL11" at 43.432,26.609 h0.08; Top Component Info "AK10" at 43.238,27.008 h0.08; Top Component Info "AL13" at 43.832,26.609 h0.08; Top Component Info "AK14" at 44.038,27.009 h0.08; Top Component Info "B2" at 41.723,32.995 h0.08; Top Component Info "A5" at 42.304,33.409 h0.08; Top Component Info "B4" at 42.107,33.009 h0.08; Top Component Info "C1" at 41.107,32.608 h0.08; Top Component Info "E1" at 41.127,32.208 h0.08; Top Component Info "D2" at 41.448,32.408 h0.08; Top Component Info "K2" at 41.448,31.208 h0.08; Top Component Info "N1" at 41.127,30.608 h0.08; Top Component Info "R1" at 41.12,30.208 h0.08; Top Component Info "P2" at 41.448,30.408 h0.08; Top Component Info "L1" at 41.087,31.008 h0.08; Top Component Info "M2" at 41.448,30.808 h0.08; Top Component Info "G1" at 41.107,31.808 h0.08; Top Component Info "J1" at 41.107,31.408 h0.08; Top Component Info "H2" at 41.448,31.608 h0.08; Top Component Info "AB2" at 41.368,28.808 h0.08; Top Component Info "AE1" at 41.055,28.208 h0.08; Top Component Info "AC1" at 41.035,28.608 h0.08; Top Component Info "AD2" at 41.368,28.408 h0.08; Top Component Info "W1" at 41.107,29.408 h0.08; Top Component Info "AA1" at 41.042,29.008 h0.08; Top Component Info "Y2" at 41.448,29.208 h0.08; Top Component Info "U1" at 41.107,29.808 h0.08; Top Component Info "V2" at 41.448,29.608 h0.08; Top Component Info "AL3" at 41.861,26.609 h0.08; Top Component Info "AK2" at 41.668,27.035 h0.08; Top Component Info "AL5" at 42.261,26.609 h0.08; Top Component Info "AK4" at 42.068,27.009 h0.08; Top Component Info "AH2" at 41.368,27.608 h0.08; Top Component Info "AJ1" at 41.035,27.408 h0.08; Top Component Info "AG1" at 41.035,27.808 h0.08